# Altium PCB BMSPowerDistribution.PcbDoc (part 3 of 6)
Units mil, origin at the board's own origin, x right, y up, seen from the top; angles counter-clockwise.
Board outline 5328.74 x 5315 mil, 4 copper layers (Top Layer, Layer 1, Layer 2, Bottom Layer), stack 24.6 mil thick; 321 components, 209 nets, 1075 pads, 489 vias.
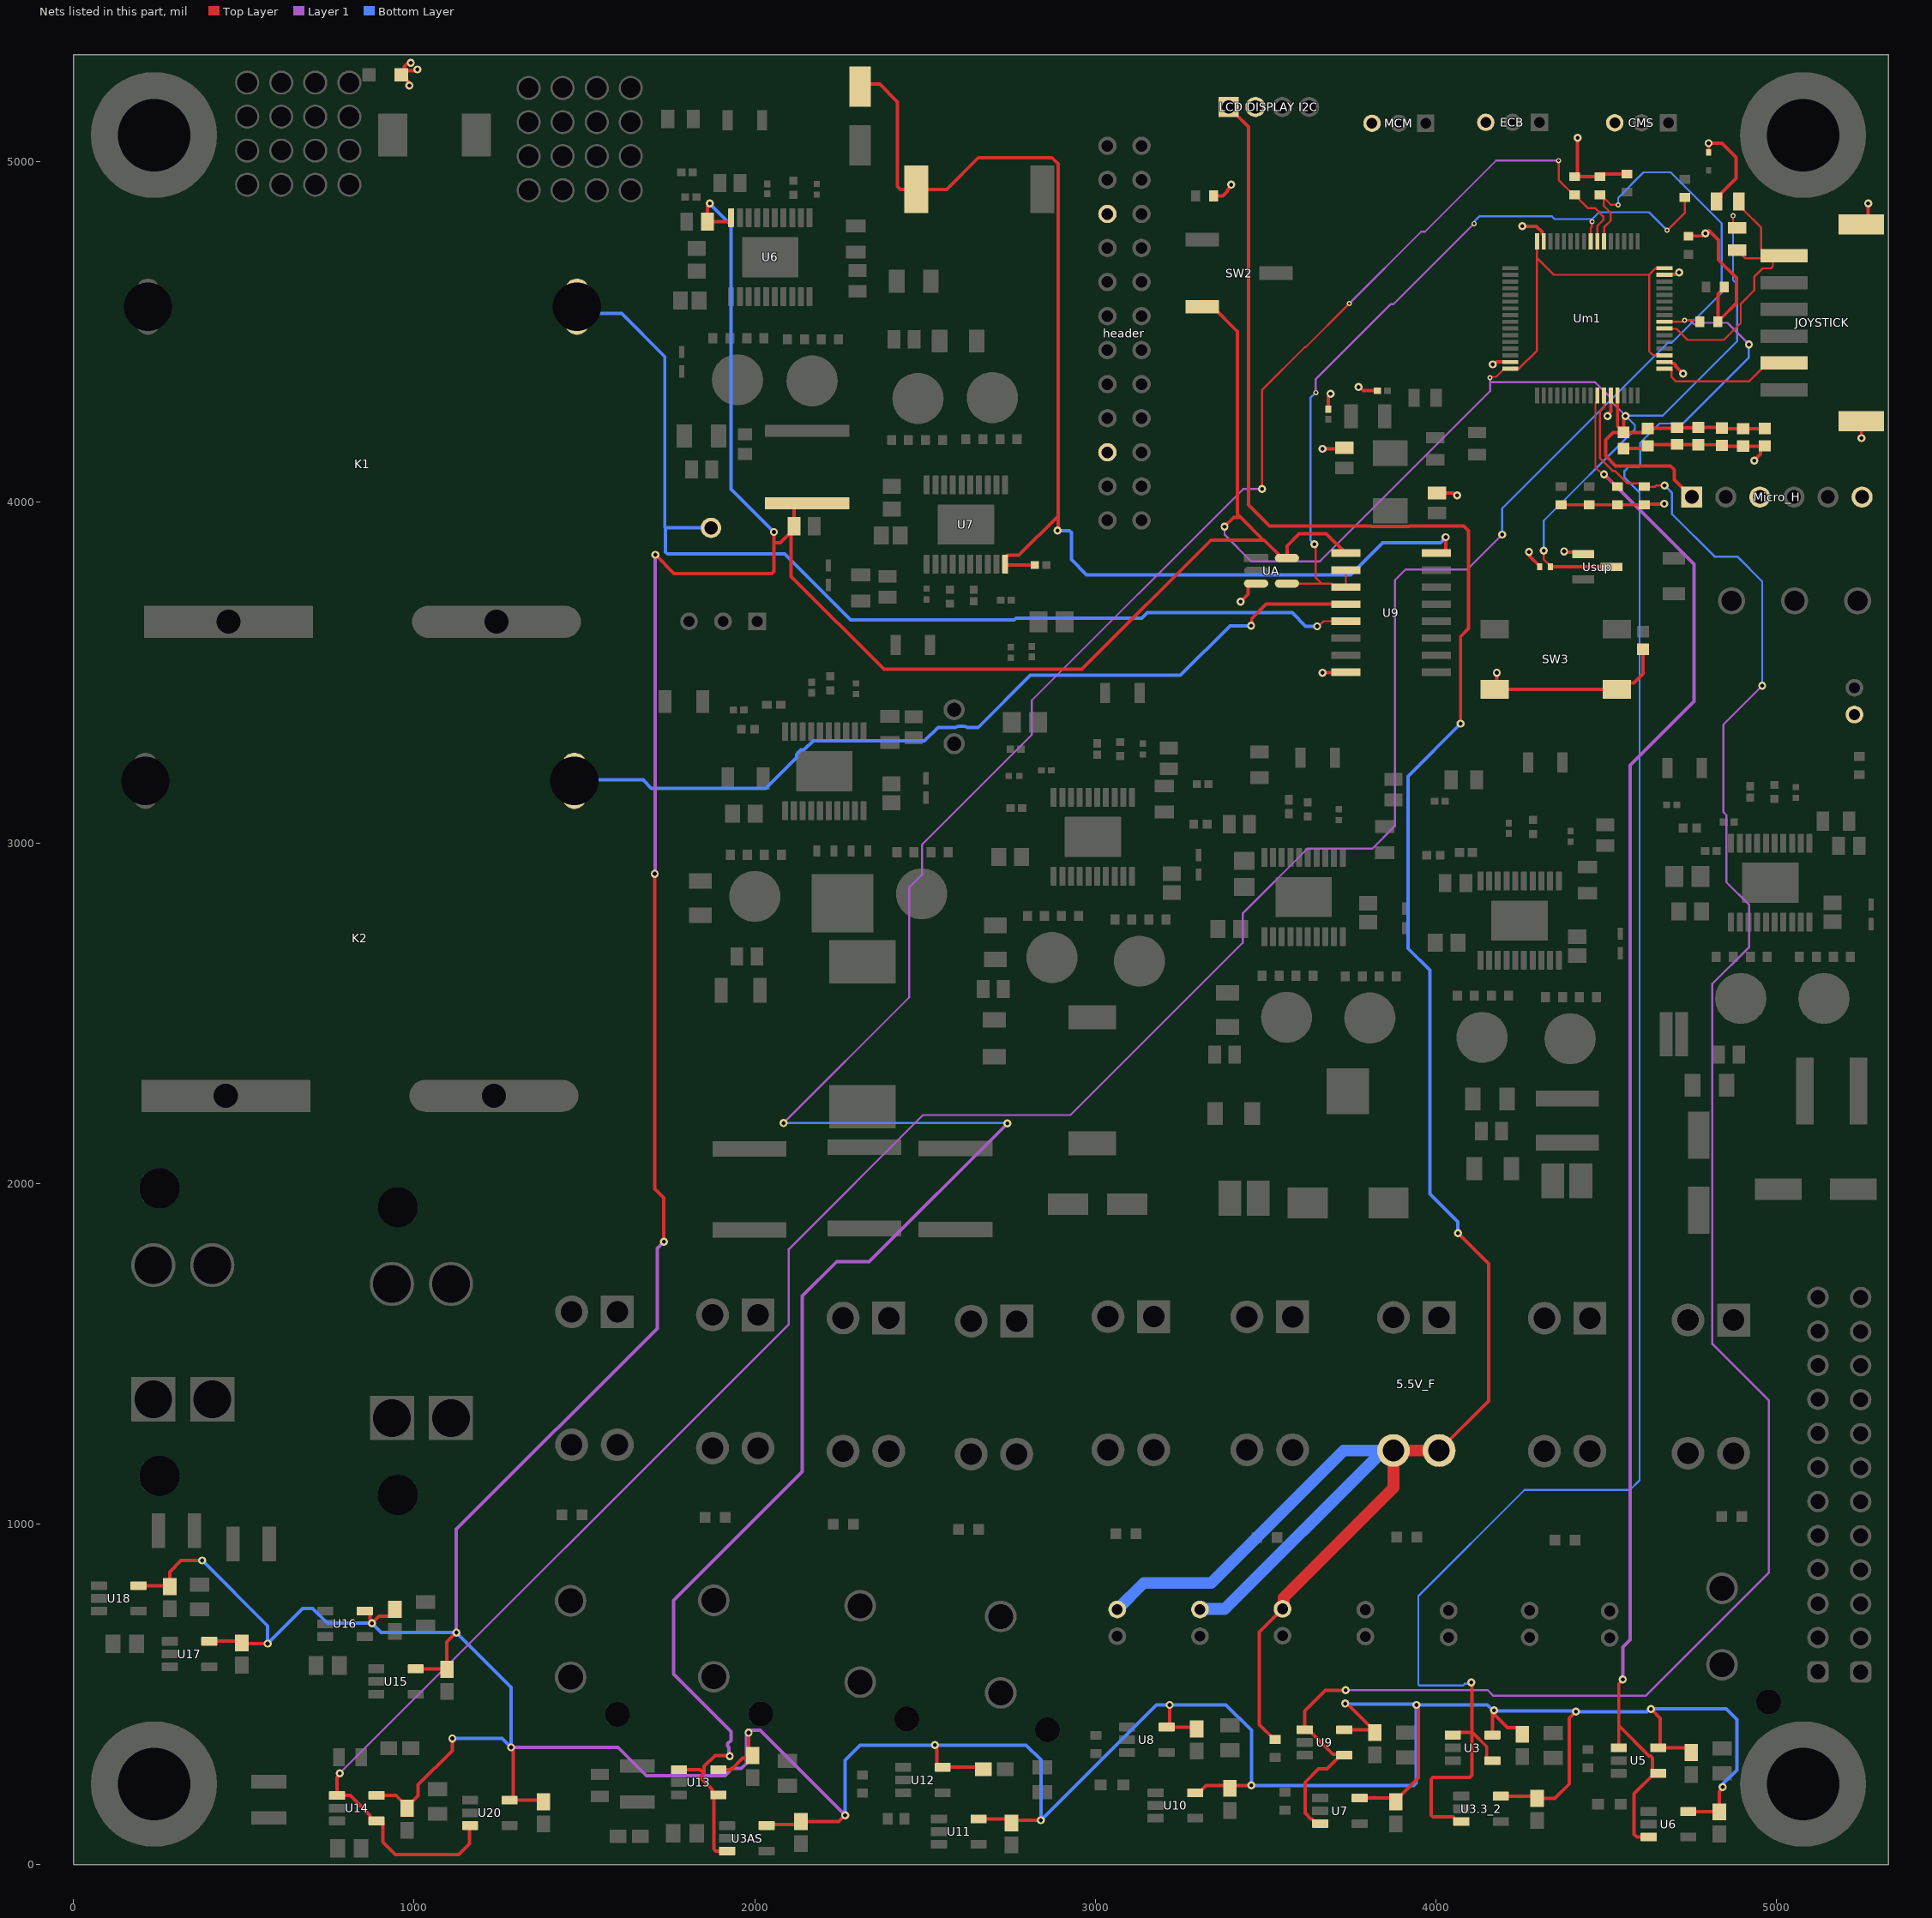
[diagram p4: the nets of this part, all layers, seen from the top]

## Via types
v1: diameter 23.62, hole 11.81, Top Layer to Bottom Layer, 370 vias
v2: diameter 19.68, hole 7.87, Top Layer to Bottom Layer, 84 vias
v3: diameter 15, hole 8, Top Layer to Bottom Layer, 35 vias

## Nets (pads, with @x,y where several pads share a name; then routed paths per layer and width w, separated by ;. In a path a pad name is that pad's centre, name@x,y a point inside that pad or via, vN(x,y) a via of type N, cw(c..) or ccw(c..) an arc to the next point about the centre after c; other vN are vias at no path point) (continued)
AND_Output: (continued)
  Bottom Layer w6: v1(3643.7,3877.02) 3643.7,3877.53 3631.89,3889.34 3631.89,4307.09 v3(3647.64,4322.83) ; v3(4112.2,4818.9) 4113.93,4820.62 4113.93,4826.06 4127.76,4839.89 4340.84,4839.89 4348.66,4832.07 v3@4459.23,4832.07 ; v3(4459.23,4824.76) v3@4459.23,4832.07 ; v3(4679.13,4799.21) 4625.98,4852.36 4479.52,4852.36 v3@4459.23,4832.07
AS_Fuse1: R37.1 U14.1 U14.4 U20.3 Um1.38 | length 7958.6
  Top Layer w6: R37.1@4493.27,4895.44 4493.27,4870.9 4513.78,4850.39 4513.78,4827.82 4494.24,4808.29 Um1.38@4494.24,4766.76 ; R37.1@4493.33,4895.38 4495.27,4893.44 4514.7,4874.02 v3(4535.43,4874.02)
  Top Layer w10: v1(781.5,267.72) 781.5,264.03 773.62,256.16 U14.1@773.62,202.76 812.24,202.76 871.14,143.86 871.14,135.75 878.94,127.95 U14.4@889.76,127.95 900.22,127.95 908.02,120.16 908.02,65.7 944.72,29 1131.72,29 1162.99,60.28 1162.99,112.77 U20.3@1164.43,114.21
  Layer 1 w6: v1(781.5,267.72) 2100.39,1586.61 2100.39,1807.09 2494.09,2200.79 2927.17,2200.79 3432.81,2706.43 3432.81,2792.76 3623.24,2983.19 3813.9,2983.19 3879.92,3049.21 3879.92,3771.65 3911.42,3803.15 4092.52,3803.15 v1(4194.88,3905.51)
  Bottom Layer w6: v1(4194.88,3905.51) 4194.88,3982.64 4680.74,4468.5 4692.2,4468.5 4839.47,4615.78 4839.47,4819.62 4689.67,4969.42 4610.17,4969.42 4535.43,4894.69 v3(4535.43,4874.02)
AS_Fuse2: R38.1 U3AS.3 U13.1 U13.4 Um1.39 | length 7772.9
  Top Layer w6: v1(3490.16,4039.37) 3490.16,4330.71 3615.94,4456.49 3618.56,4456.49 v3(3746.06,4583.99) ; v3(4360.71,5003.94) 4360.71,4947.16 4404.46,4903.41 R38.1@4407.48,4903.41 4446.3,4864.59 4467.3,4864.59 4491.85,4840.03 4491.85,4829.11 4474.56,4811.82 Um1.39@4474.56,4766.76
  Top Layer w10: U13.1@1777.56,278.54 1839.8,278.54 1851.38,266.97 ; U13.4@1880.21,204.35 1879.92,204.06 1879.92,45.23 1885.78,39.37 U3AS.3@1923.85,39.37 ; U13.4@1893.7,203.74 1882.87,203.74 1875.08,211.54 1875.08,220.51 1844.14,251.45 1844.14,259.73 1851.38,266.97 ; v1(1926.97,317.85) 1924.57,320.26 1883.56,320.26 1851.38,288.07 1851.38,266.97
  Layer 1 w6: v1(2084.65,2177.17) 2453.85,2546.37 2453.85,2869.2 2491.09,2906.45 2491.09,2994.63 2813.93,3317.47 2813.93,3418.85 3434.45,4039.37 v1(3490.16,4039.37) ; v3(3746.06,4583.99) 3956.9,4794.82 3968.45,4794.82 4177.56,5003.94 v3(4360.71,5003.94)
  Layer 1 w10: v1(1926.97,317.85) 1924.37,320.46 1924.37,344.04 1921.16,347.25 1921.16,355.53 1930.12,364.49 1930.12,390.75 1761.81,559.06 1761.81,775.59 2139.76,1153.54 2139.76,1669.29 2241,1770.53 2336.55,1770.53 v1(2742.13,2176.1)
  Bottom Layer w6: v1(2084.65,2177.17) 2741.06,2177.17 v1(2742.13,2176.1)
COM: JOYSTICK.6 RJ1.2 RJ2.2 Um1.23 | length 830.7
  Top Layer w6: Um1.23@4671.41,4510.85 4672.41,4509.85 4706.96,4509.85 4739.81,4477 4845.72,4477 4895.67,4526.95 4895.67,4583.2 4935.04,4622.57 4935.04,4662.3 4960.04,4687.3 4984.1,4687.3 4989.95,4693.16 4989.95,4709.72 4983.16,4716.52 4909.46,4716.52 RJ2.2@4884.84,4741.14 ; RJ1.2@4900.59,4862.2 4901.42,4862.2 4903.42,4860.2 4903.42,4859.38 4955.65,4807.14 4955.65,4744.61 4956.74,4743.52 4956.74,4741.09 4973.43,4724.41 JOYSTICK.6@5022.64,4724.41
con1_voltage: JR.1 K1.5 U9.5@3735.97,3651.18 | length 3137.8
  Top Layer w6: v1(3651.57,3636.15) 3655.26,3636.15 3670.29,3651.18 U9.5@3735.97,3651.18
  Top Layer w10: K1.5@1478.35,4574.8 1478.35,4560.68 K1.5@1483.9,4555.12
  Bottom Layer w10: K1.5@1494.09,4555.12 1609.25,4555.12 1736.14,4428.23 1736.14,3927.07 1738.01,3925.2 ; JR.1@1872.05,3925.2 1738.01,3925.2 ; v1(3651.57,3636.15) 3618.25,3636.15 3578.17,3676.23 3153.01,3676.23 3137.3,3660.51 2767.59,3660.51 2761.6,3654.53 2281.57,3654.53 2087.51,3848.58 1743.87,3848.58 1738.01,3854.44 1738.01,3925.2
con_voltage: K2.5 U9.4@3735.97,3701.18 | length 2518
  Top Layer w10: v1(3457.87,3637.73) 3459.72,3639.59 3459.72,3658.54 3502.36,3701.18 U9.4@3735.97,3701.18
  Bottom Layer w10: K2.5@1470.64,3182.57 1473.1,3185.04 1672.13,3185.04 1696.85,3160.32 2032.36,3160.32 2122.94,3250.9 2122.94,3259.78 2136.25,3273.09 2145.13,3273.09 2172.28,3300.23 2499.05,3300.23 2538.39,3339.57 2588.7,3339.57 cw(c2607.2,3296.34) 2625.71,3339.57 2656.5,3339.57 2809.06,3492.13 3250,3492.13 3395.61,3637.73 v1(3457.87,3637.73)
DGND: "LCD DISPLAY I2C.2" C1.1 C2.1 C3.1 C4.1 C13.2 C29.2 C32.1 C33.1 C34.1 C35.1 C50.1 C51.1 C52.2 C53.2 CMS.3 D11.1 ECB.3 header.6 header.20 JOYSTICK.MP1 JOYSTICK.MP2 MCM.3@3812.82,5113.33 Micro_H.3 Micro_H.6 NT1.1 R30.2 R31.2 R32.2 R33.2 R34.2 R35.2 R36.2 R37.2 R38.2 R50.2 RF.2 RJ1.1 SW3.1 SW3.2 U9.8 UA.3 Um1.12 Um1.18 Um1.31 Um1.47 Um1.63 Usup.1 | length 3561.3
  Top Layer w10: NT1.1@962.6,5255.91 983.61,5234.89 983.61,5227.02 v1(986.22,5224.41) ; v1(990.16,5291.34) 987.55,5288.73 979.61,5288.73 971.47,5280.59 971.47,5269.6 972.94,5268.12 1002.63,5268.12 1006.16,5271.65 v1(1009.84,5271.65) ; R50.2@3347.84,4900 3374.41,4900 3388.12,4913.71 3388.12,4917.9 3399.61,4929.38 v1(3399.61,4933.07) ; v1(3427.17,3708.66) 3449.58,3731.07 3449.58,3755.3 3456.09,3761.81 UA.3@3472.42,3761.81 ; v1(3667.32,3500) 3667.91,3500.59 3735.38,3500.59 U9.8@3735.97,3501.18 ; v1(3667.32,4157.48) 3728.51,4157.48 C32.1@3731.56,4160.53 ; C35.1@3684.56,4273.81 3684.56,4308.83 3690.94,4315.21 v1(3690.94,4318.9) ; v1(3773.33,4338.88) 3777.02,4338.88 3787.89,4328 C34.1@3828.66,4328 ; C33.1@4003.56,4028.06 4051.92,4028.06 4059.31,4020.67 v1(4062.99,4020.67) ; v1(4167.32,4405.51) 4171.01,4405.51 4177.92,4412.43 Um1.63@4218.65,4412.43 ; v1(4179.13,3500) 4179.13,3456.69 SW3.2@4173.23,3450.79 SW3.1@4531.5,3450.79 4550.48,3469.77 4581.98,3469.77 4608.27,3496.06 C50.1@4608.27,3568.9 ; v1(4253.94,4811.02) 4295.35,4811.02 4312.39,4793.98 4312.39,4788.94 4316.08,4785.26 4316.08,4767.76 Um1.47@4317.08,4766.76 ; v1(4273.62,3854.33) 4276.23,3851.72 4276.23,3841.88 4305.12,3812.99 C29.2@4305.12,3811.02 ; R30.2@4368.11,3993.04 R31.2@4450.79,3993.04 R32.2@4533.46,3993.04 4615.22,3993.04 4616.73,3994.55 4669.75,3994.55 v1(4671.26,3996.06) ; v1(4376.97,3856.3) 4379.57,3853.69 4427.14,3853.69 Usup.1@4432.41,3848.42 ; R38.2@4407.48,4956.69 R37.2@4482.28,4956.69 4490.16,4964.57 R36.2@4561.02,4964.57 4558.32,4967.27 R36.2@4558.32,4972.2 ; R38.2@4408.37,4956.69 4416.34,4964.66 v1(4416.34,5070.87) ; v1(4504.24,4253.77) 4504.24,4257.45 4513.93,4267.14 Um1.12@4513.93,4314 ; C13.2@4551.72,4158.34 4614.05,4158.34 C52.2@4622.05,4166.34 4625.98,4170.28 C51.1@4708.66,4170.28 4769.68,4170.28 C4.1@4770.67,4169.29 4838.58,4169.29 C3.1@4840.55,4167.32 4842.52,4165.35 C2.1@4902.56,4165.35 4965.55,4165.35 C1.1@4966.54,4166.34 4965.55,4166.34 4953.82,4154.61 4953.82,4142.1 4935,4123.28 v1(4935,4123) ; Um1.18@4671.41,4412.43 4688.91,4412.43 4693.59,4407.74 4698.64,4407.74 4703.91,4402.47 4703.91,4400.42 v1(4726.38,4377.95) ; Um1.31@4671.41,4668.33 4672.41,4669.33 4705.03,4669.33 4710.85,4675.15 v1(4714.54,4675.15) ; C53.2@4742.13,4781.5 4743.11,4782.48 4780.73,4782.48 4788.23,4789.98 4793.9,4789.98 4802.16,4798.24 4830.09,4770.3 4830.09,4711.95 4882.72,4659.33 4882.72,4585.16 4839.55,4541.99 4836.53,4541.99 4828.56,4534.02 R34.2@4828.56,4531 4828.56,4611.54 4847,4629.98 R35.2@4847,4633 ; D11.1@4801.18,5027.56 v1(4801.18,5055.12) 4840.55,5055.12 4881.89,5013.78 4881.89,4952.05 4836.46,4906.62 4836.46,4895.51 RJ1.1@4824.72,4883.78 ; JOYSTICK.MP1@5249.02,4238.19 5250,4237.2 v1(5250,4188.98) ; JOYSTICK.MP2@5249.02,4816.93 5269.68,4837.6 v1(5269.68,4877.95)
  other v1: 4791.92,4789.98
DOWN: JOYSTICK.2 Um1.17 | length 401.6
  Top Layer w6: Um1.17@4671.41,4392.74 4688.88,4392.74 4691.88,4389.74 4691.88,4368.56 4705.17,4355.27 4919.24,4355.27 4973.42,4409.45 JOYSTICK.2@5022.64,4409.45
Fan_Fuse: R32.1 U5.1@4537.4,342.52 U5.4@4653.54,267.72 U6.3@4625,80.71 Um1.10 | length 4689.3
  Top Layer w6: Um1.10@4474.56,4314 4474.56,4296.5 4468.72,4290.66 4468.72,4102.66 4478.8,4092.57 4479.43,4092.57 4489.33,4082.68 v1(4494.09,4082.68) 4530.44,4046.33 R32.1@4533.46,4046.33
  Top Layer w10: U5.1@4537.4,342.52 4537.4,407.72 ; v1(4549.21,543.31) 4549.21,542.45 4537.4,530.64 4537.4,407.72 ; U6.3@4625,80.71 4590.55,80.71 4582.68,88.58 4582.68,207.68 U5.4@4642.72,267.72 ; U5.4@4653.54,267.72 U5.4@4642.72,267.72 ; 4537.4,407.72 4626.46,318.66 4630.98,318.66 4636.84,312.8 4636.84,273.59 U5.4@4642.72,267.72
  Layer 1 w10: v1(4494.09,4082.68) 4757.87,3818.9 4757.87,3415.35 4570.87,3228.35 4570.87,660.32 4549.21,638.67 v1(4549.21,543.31)